# Altium PCB PCB1.PcbDoc (part 2 of 3)
Units mil, origin at the board's own origin, x right, y up, seen from the top; angles counter-clockwise.
Board outline 5020 x 3185 mil, 4 copper layers (Top Layer, GND, VCC, Bottom Layer), stack 23.756 mil thick; 166 components, 117 nets, 551 pads, 495 vias.
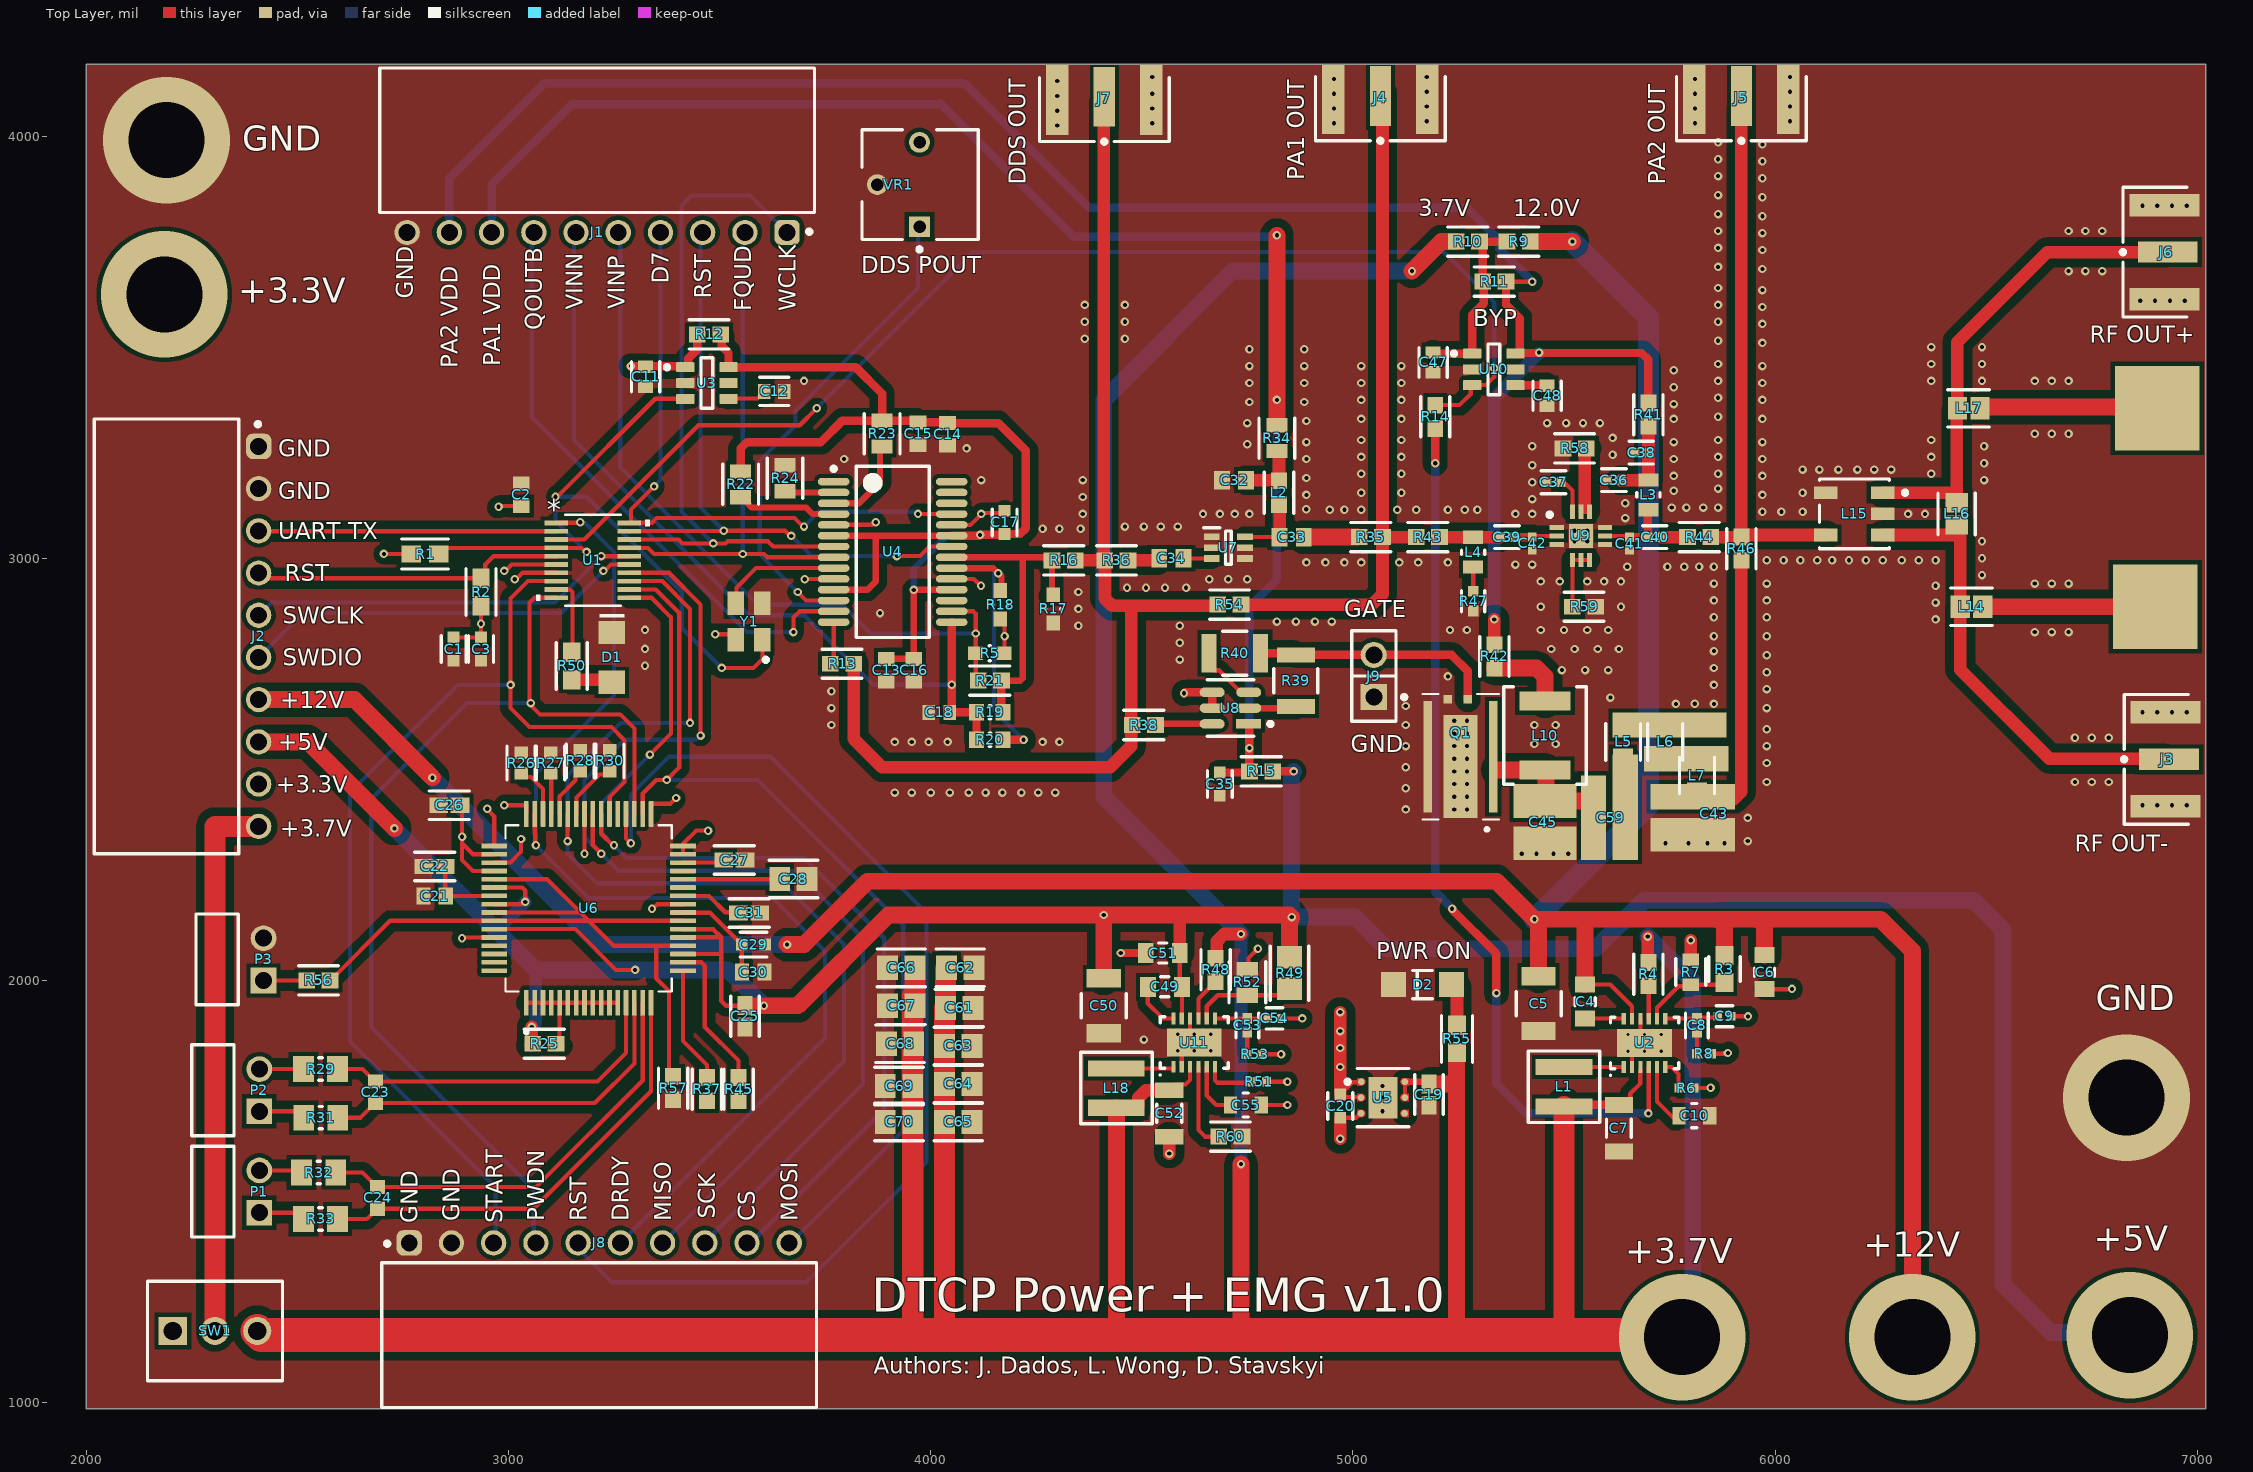
[diagram p0: Top Layer view]

## Part data (continued)
R5 R17 R18: library part CMP-03412-002710-1, "RES SMD 0603 1/4W 1% 100 OHM", Manufacturer=Yageo, Package=SR0603, Power Rating=0.25W, Resistance=100Ω, Temperature="-55°C to +155°C", Temperature Range High=+155°C, Temperature Range Low=-55°C, Tolerance=0.01, Voltage Rating=75V, Automotive=Yes, Automotive Grade="Grade 0", Category=Res, ComponentLink2Description=Datasheet, ComponentLink2URL=http://www.yageo.com/documents/recent/PYu-SR_D_F%20tol_RoHS_L_3.pdf, Composition="Thick Film", Device Class L1="Passive Components", Device Class L2=Resistors, Device Class L3="Chip SMD Resistors", Digikey Description="RES SMD 0603 1/4W 1% 100 OHM", Footprint Url=http://www.yageo.com/exep/pages/download/literatures/PYu-R_Mount_10.pdf, Height=0.55mm, Ipc Land Pattern Name=RESC16080X45, Lead Free=Yes, Manufacturer Part Number=SR0603FR-7T100RL, Octopart=https://octopart.com/sr0603fr-7t100rl-yageo-91478072, RoHS=TRUE, Series=SR
R6 R51: library part CMP-2002-01001-1, Manufacturer=Panasonic, Part Number=ERJ-2RKF5762X
R7: library part CMP-02407-003381-1, "RES Thick Film, 113kΩ, 1%, 0.1W, 100ppm/°C, 0603", Case/Package=0603, Max Operating Temperature=155°C, Max Power Dissipation=100mW, Min Operating Temperature=-55°C, Package Quantity=20000, Resistance=113kR, Temperature Coefficient=100ppm/°C, Tolerance=1%, Composition="Thick Film", Features="Automotive AEC-Q200", Height=0.02inch, Lead Free="Lead Free", Length=0.061inch, Number of Terminations=2, Packaging="Tape and Reel", Power Rating=100mW, Width=0.033inch
R8 R53: library part CMP-2002-00247-1, Manufacturer="Vishay Dale", Part Number=CRCW040286K6FKED
R19 R20: library part CMP-1012-00736-1, "100K 0.1W 1% 0603 (1608 Metric)  SMD", Case-EIA=0603, Case-Metric=1608, Power="0.1 W", Tolerance="1 %", Technology=SMT
R22 R23 R24: library part CMP-08839-027843-1, "82Ω ±5% 0.4W 0805 Anti-Surge Chip Resistor AEC-Q200", Case Code (Imperial)=0805, Case Code (Metric)=2012, Max Power Dissipation=400mW, Power Rating=250mW, Resistance=82R, Temperature Coefficient=200ppm/°C, Tolerance=5%, Case/Package=0805, Features="Automotive AEC-Q200", Lead Free="Lead Free", Number of Terminations=2, Packaging="Cut Tape", RoHS Compliant=Yes, Series=ESR, Size Code=0805
R26 R27 R28 R30: library part CMP-03211-009884-1, "CRGCQ 0603 10K 5%", Ambient Temperature Range High=+70°C, Manufacturer="TE Connectivity", Package=CRGCQ0603, Power Rating=0.1W, Resistance=10KΩ, Temperature="-55°C to +155°C", Temperature Coefficient=±100ppm/°C, Temperature Range High=+155°C, Temperature Range Low=-55°C, Tolerance=0.05, Voltage Rating=75V, Category=Res, ComponentLink2Description=Datasheet, ComponentLink2URL=https://www.te.com/commerce/DocumentDelivery/DDEController?Action=showdoc&DocId=Data+Sheet%7F1773204-3%7F1%7Fpdf%7FEnglish%7FENG_DS_1773204-3_1.pdf%7F4-2176339-923, Composition="Thick Film", Device Class L1="Passive Components", Device Class L2=Resistors, Device Class L3="Chip SMD Resistors", Digikey Description="CRGCQ 0603 10K 5%", Height=0.55mm, Ipc Land Pattern Name=RESC16080X45, Lead Free=Yes, Manufacturer Part Number=CRGCQ0603J10K, Mouser Description="Res Thick Film 0603 10K Ohm 5% 0.1W(1/10W) ±100ppm/C Pad SMD Automotive T/R", Octopart=https://octopart.com/crgcq0603j10k-te+connectivity-91018097, RoHS=TRUE, Series=CRGCQ
R29 R31 R32 R33: library part CMP-2001-04239-1, Manufacturer="Vishay Dale", Part Number=CRCW08055K00FKTA
R34: library part CMP-08839-028611-1, "24Ω ±5% 0.4W 0805 Anti-Surge Chip Resistor AEC-Q200", Case Code (Imperial)=0805, Case Code (Metric)=2012, Max Operating Temperature=155°C, Max Power Dissipation=400mW, Min Operating Temperature=-55°C, Package Quantity=1, Resistance=24R, Resistor Type="Thick Film", Temperature Coefficient=200ppm/°C, Tolerance=5%, Case/Package=0805, Features="Automotive AEC-Q200", Height=0.026inch, Length=0.079inch, Number of Terminations=2, Packaging="Tape and Reel", RoHS Compliant=Yes, Series=ESR, Width=0.049inch
R39 R40: library part CMP-08839-008954-1, "2Ω ±1% 0.66W 1210 Anti-Surge Chip Resistor AEC-Q200", Case Code (Imperial)=1210, Case Code (Metric)=3225, Max Operating Temperature=155°C, Max Power Dissipation=500mW, Min Operating Temperature=-55°C, Package Quantity=1, Resistance=2R, Resistor Type="Thick Film", Temperature Coefficient=100ppm/°C, Tolerance=1%, Case/Package=1210, Features="Automotive AEC-Q200", Height=0.026inch, Lead Free="Lead Free", Length=0.126inch, Number of Terminations=2, Packaging="Tape and Reel", Power Rating=500mW, RoHS Compliant=Yes, Series=ESR, Size Code=1210, Width=0.098inch
R47: library part CMP-05494-120702529-1, "FCHP0402E50R0BBT1 SMD Chip Resistor, 50 Ohm, ± 0.1%, 1 W, 0402 [1005 Metric], Thin Film, High Frequency", Case/Package=0402, Max Operating Temperature=155°C, Min Operating Temperature=-55°C, Power Rating=1W, Resistance=50Ω, Temperature Coefficient=25ppm/°C, Tolerance=0.1%, Voltage Rating=30V, Composition="Thin Film", Height=419.1µm, NexarPartId=120702529, Schedule B=8533210045
R49: library part CMP-250906-237835-1, "RES Thin Film,  42.2kΩ, 0.1%, 0.1W, 25ppm/°C, 0805"
R50 R55: library part CMP-02407-003593-1, "RES Thick Film, 220Ω, 1%, 0.33W, 100ppm/°C, 0603", Case Code (Imperial)=0603, Case Code (Metric)=1608, Max Operating Temperature=155°C, Max Power Dissipation=250mW, Min Operating Temperature=-55°C, Package Quantity=5000, Resistance=220R, Temperature Coefficient=100ppm/°C, Tolerance=1%, Voltage Rating=75V, Case/Package=0603, Composition="Thick Film", Contact Plating=Tin, Depth=0.85mm, Features="Automotive AEC-Q200", Height=0.45mm, Lead Free="Lead Free", Length=1.6mm, Military Standard=Not, Mount="Surface Mount", Number of Terminations=2, Packaging="Tape and Reel", Power Rating=250mW, Radiation Hardening=No, Termination=SMD/SMT, Voltage Rating (DC)=75V, Weight=7.1E-05oz, Width=0.033inch
R52: library part CMP-03211-006861-1, "CRGP 0805 10K 1%", Ambient Temperature Range High=+70°C, Manufacturer=TE, Package=CRGP0805, Power Rating=0.33W, Resistance=10KΩ, Temperature="-55°C to +155°C", Temperature Coefficient=±100ppm/°C, Temperature Range High=+155°C, Temperature Range Low=-55°C, Tolerance=0.01, Voltage Rating=150V, Automotive=No, Category=Res, ComponentLink2Description=Datasheet, ComponentLink2URL=https://www.mouser.com/datasheet/2/418/NG_DS_9-1773463-9_A-1358566.pdf, Composition="Thick Film", Device Class L1="Passive Components", Device Class L2=Resistors, Device Class L3="Chip SMD Resistors", Digikey Description="CRGP 0805 10K 1%", Height=0.65mm, Ipc Land Pattern Name=RESC200125X55, Lead Free=Yes, Manufacturer Part Number=CRGP0805F10K, Octopart=https://octopart.com/crgp0805f10k-te+connectivity-91018782, RoHS=TRUE, Series=CRGP
SW1: library part CMP-03408-000020-1, "SWITCH TOGGLE SPST 0.4VA 20V", Contact Current Rating=3A, Max Operating Temperature=85°C, Max Voltage Rating (AC)=20V, Min Operating Temperature=-30°C, Package Quantity=25, Power Rating=400mW, Actuator Length=5.61mm, Actuator Type=Toggle, Contact Plating=Gold, Illumination Type=Illuminated, Max Voltage Rating (DC)=20V, Mount=Brackets, Orientation=Straight, Packaging=Bulk, RoHS Compliant=Yes, Series="TT (Tiny)", Termination="PC Pins", Throw Configuration=SPST, Voltage Rating (AC)=20V, Voltage Rating (DC)=20V
U1: "24MHz ArmÂ® CortexÂ®-M0+ MCU with 16KB flash, 1KB SRAM, 12-bit ADC 20-VSSOP -40 to 125", Manufacturer_Name="Texas Instruments", Copyright="Copyright (C) 2025 Ultra Librarian. All rights reserved.", Datasheet=https://www.ti.com/lit/gpn/mspm0c1104, Manufacturer_Part_Number=MSPM0C1104SDGS20R, RefDes=RefDes, Type=Type
U2 U11: library part CMP-0492-00369-1, "2.5 A Synchronous Step-Up DC/DC Converter with Output Disconnect, 12-pin SON (DE-UE-12), -40 to 125 degC, Pb-Free", Manufacturer="Linear Technology", Code_JEDEC=MO-229, ComponentLink1Description="Manufacturer URL", ComponentLink1URL=http://www.linear.com/, ComponentLink2Description=Datasheet, ComponentLink2URL=http://cds.linear.com/docs/en/datasheet/3122fa.pdf, ComponentLink3Description="Package Specification", ComponentLink3URL=http://cds.linear.com/docs/en/packaging/DFN_12_05-08-1695.pdf, DatasheetVersion="Rev. A", Mounting Technology="Surface Mount", Number of Outputs=1, PackageDescription="12-Pin Plastic DFN, Body 4 x 3 mm, Pitch 0.5 mm", PackageReference=DE-UE-12, PackageVersion="Rev. D, 06/2010", PartNumber=LTC3122EDE#PBF, RoHS=TRUE
U3 U10: library part CMP-04910-000007-2, "IC PWR SWITCH N-CHAN 1:1 SOT23-6", Case/Package=SOT-23-6, Max Operating Temperature=105°C, Max Output Current=2A, Max Supply Voltage=18V, Min Operating Temperature=-40°C, Min Supply Voltage=2.7V, Package Quantity=3000, Fault Protection="Over Temperature", Interface=On/Off, Number of Channels=1, Number of Outputs=1, Output Configuration="High Side", Packaging="Cut Tape", RoHS Compliant=Yes, Series=TPS22810-Q1, Weight=0.000801oz
U4: library part CMP-0293-00041-1, "CMOS, 125 MHz Complete DDS Synthesizer, 10-Bit, Parallel, Serial, RS-28, 1500 Reel, Pb-Free", Code_JEDEC=MO-150-AH, Compliance Range (V)=1.5V, ComponentLink1Description="Manufacturer URL", ComponentLink1URL=www.analog.com, ComponentLink2Description=Datasheet, ComponentLink2URL=http://www.analog.com/static/imported-files/data_sheets/AD9850.pdf, ComponentLink3Description="Package Specification", ComponentLink3URL=http://www.analog.com/static/imported-files/packages/32122249223724RS_28.pdf, DatasheetVersion="Rev. H", FS Iout (mA nom)=20mA, I Supply total (max)=96mA, I/O Interface="Parallel, Serial", Master fclk=125MHz, PackageDescription="28-Lead Shrink Small Outline Package [SSOP]", PackageReference=RS-28, PackageVersion="revA, 1997", REFCLK Multiplier=No, Resolution (Bits)=10bit, Tuning Word Width (bits)=32bit
U5: library part CMP-12153-000011-1, "IC REG LINEAR 3.3V 2A 6DFN", Case/Package=DFN, Dropout Voltage=130mV, Max Input Voltage=6V, Max Operating Temperature=125°C, Min Input Voltage=1.25V, Min Operating Temperature=-40°C, Operating Supply Current=1mA, Output Current=2A, Output Voltage=3.3V, Package Quantity=3000, Lead Free="Lead Free", Mount="Surface Mount", Number of Outputs=1, Number of Regulators=1, Output Type=Fixed, Packaging="Tape and Reel"